# EAGLE board pic_k42 (EAGLE 9.6.2)
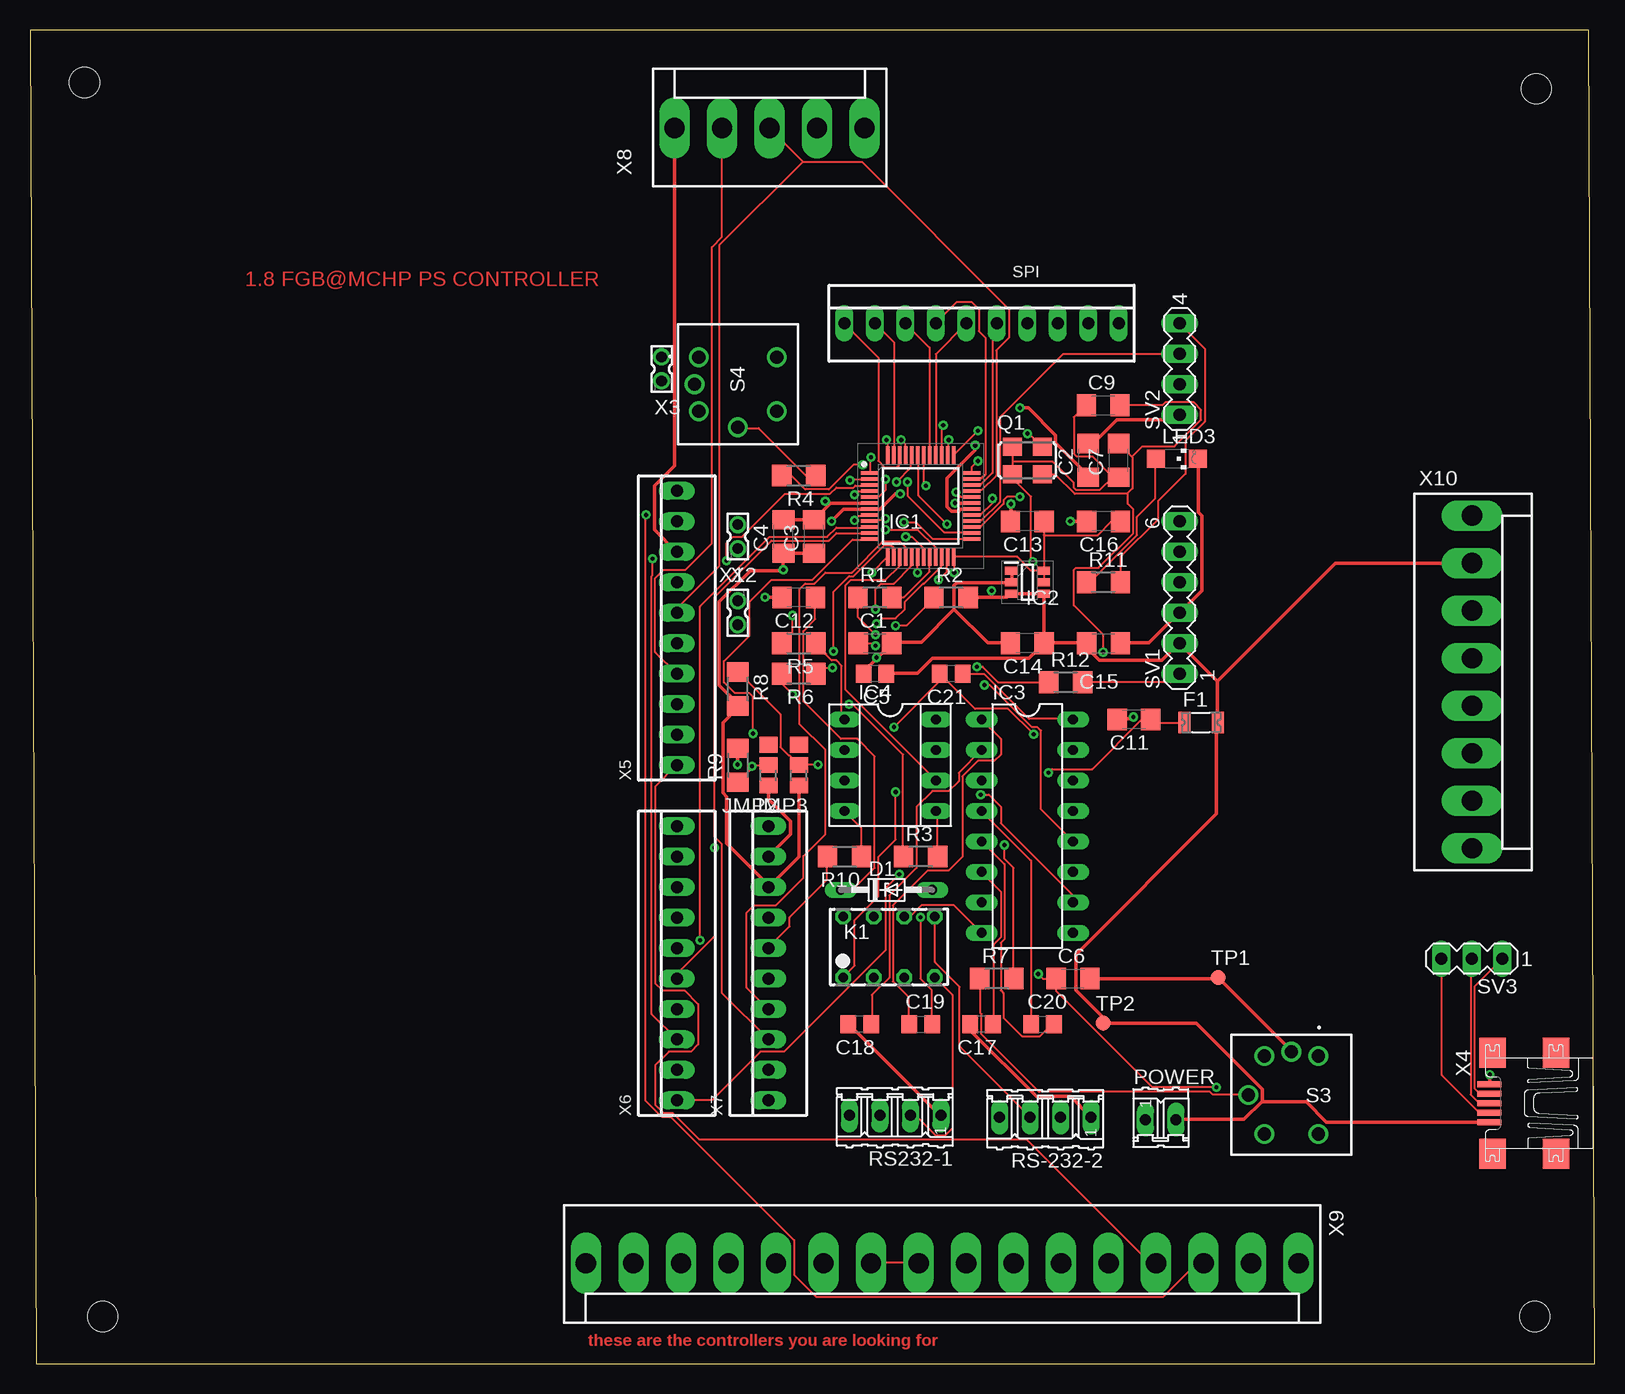
[diagram p0: board, top side]
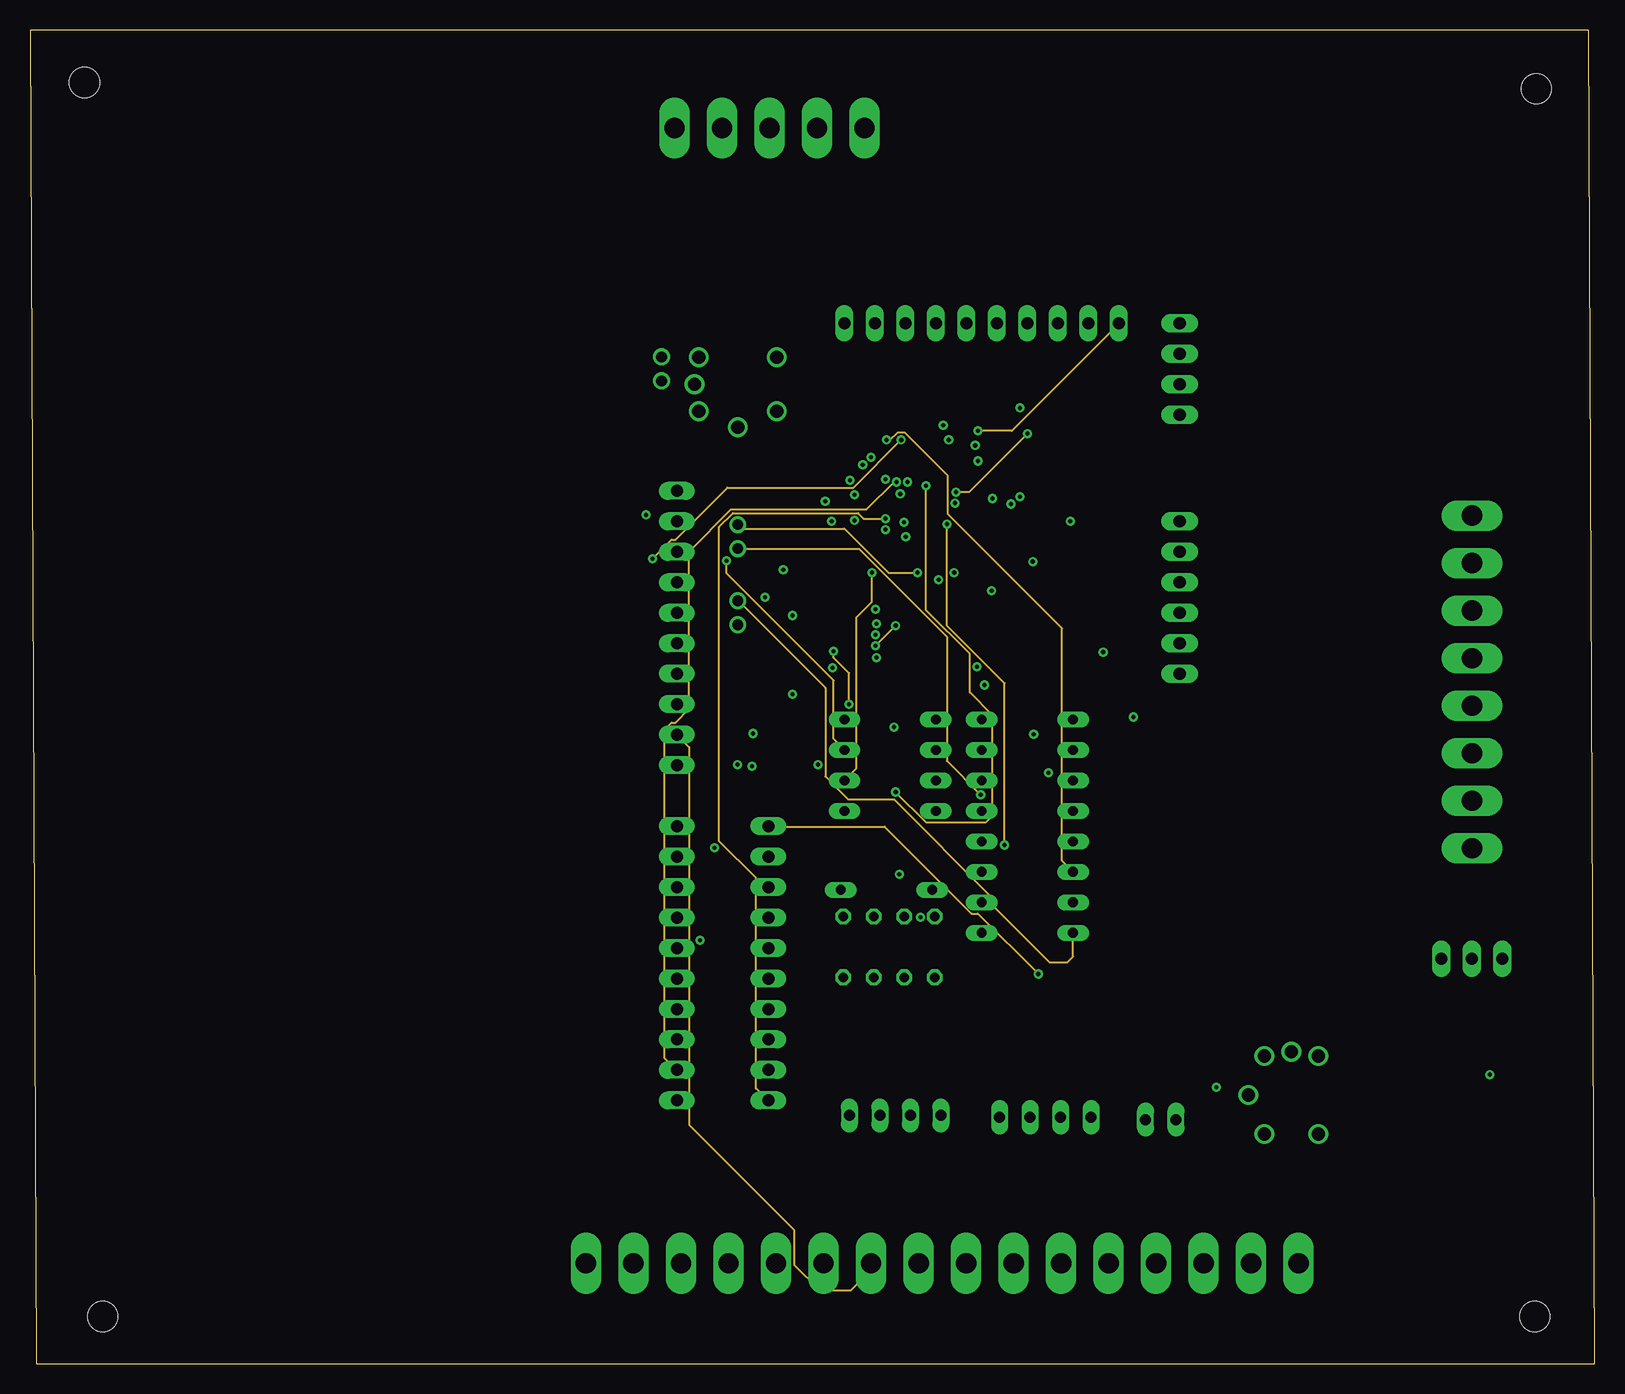
[diagram p1: board, inner layer Route2]
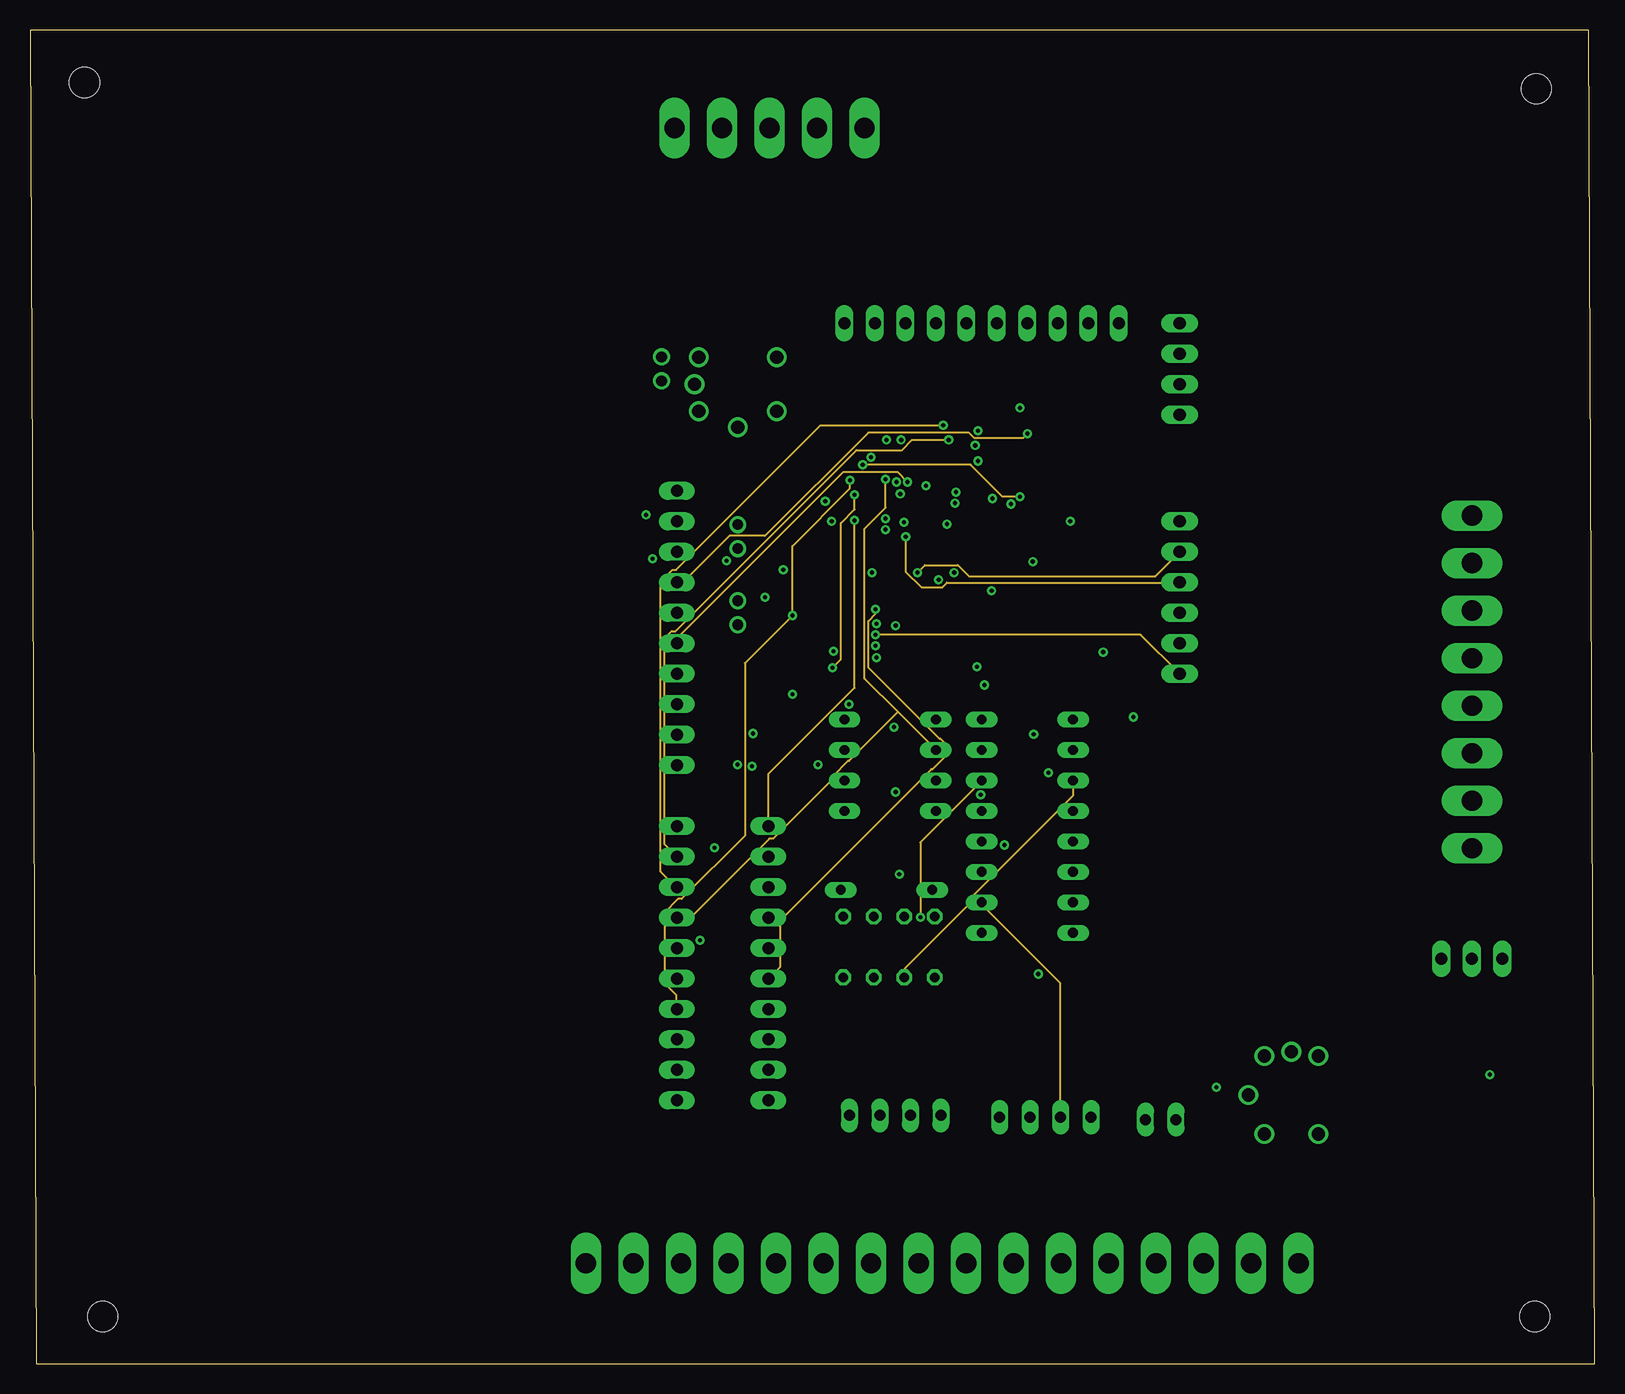
[diagram p2: board, inner layer Route15]
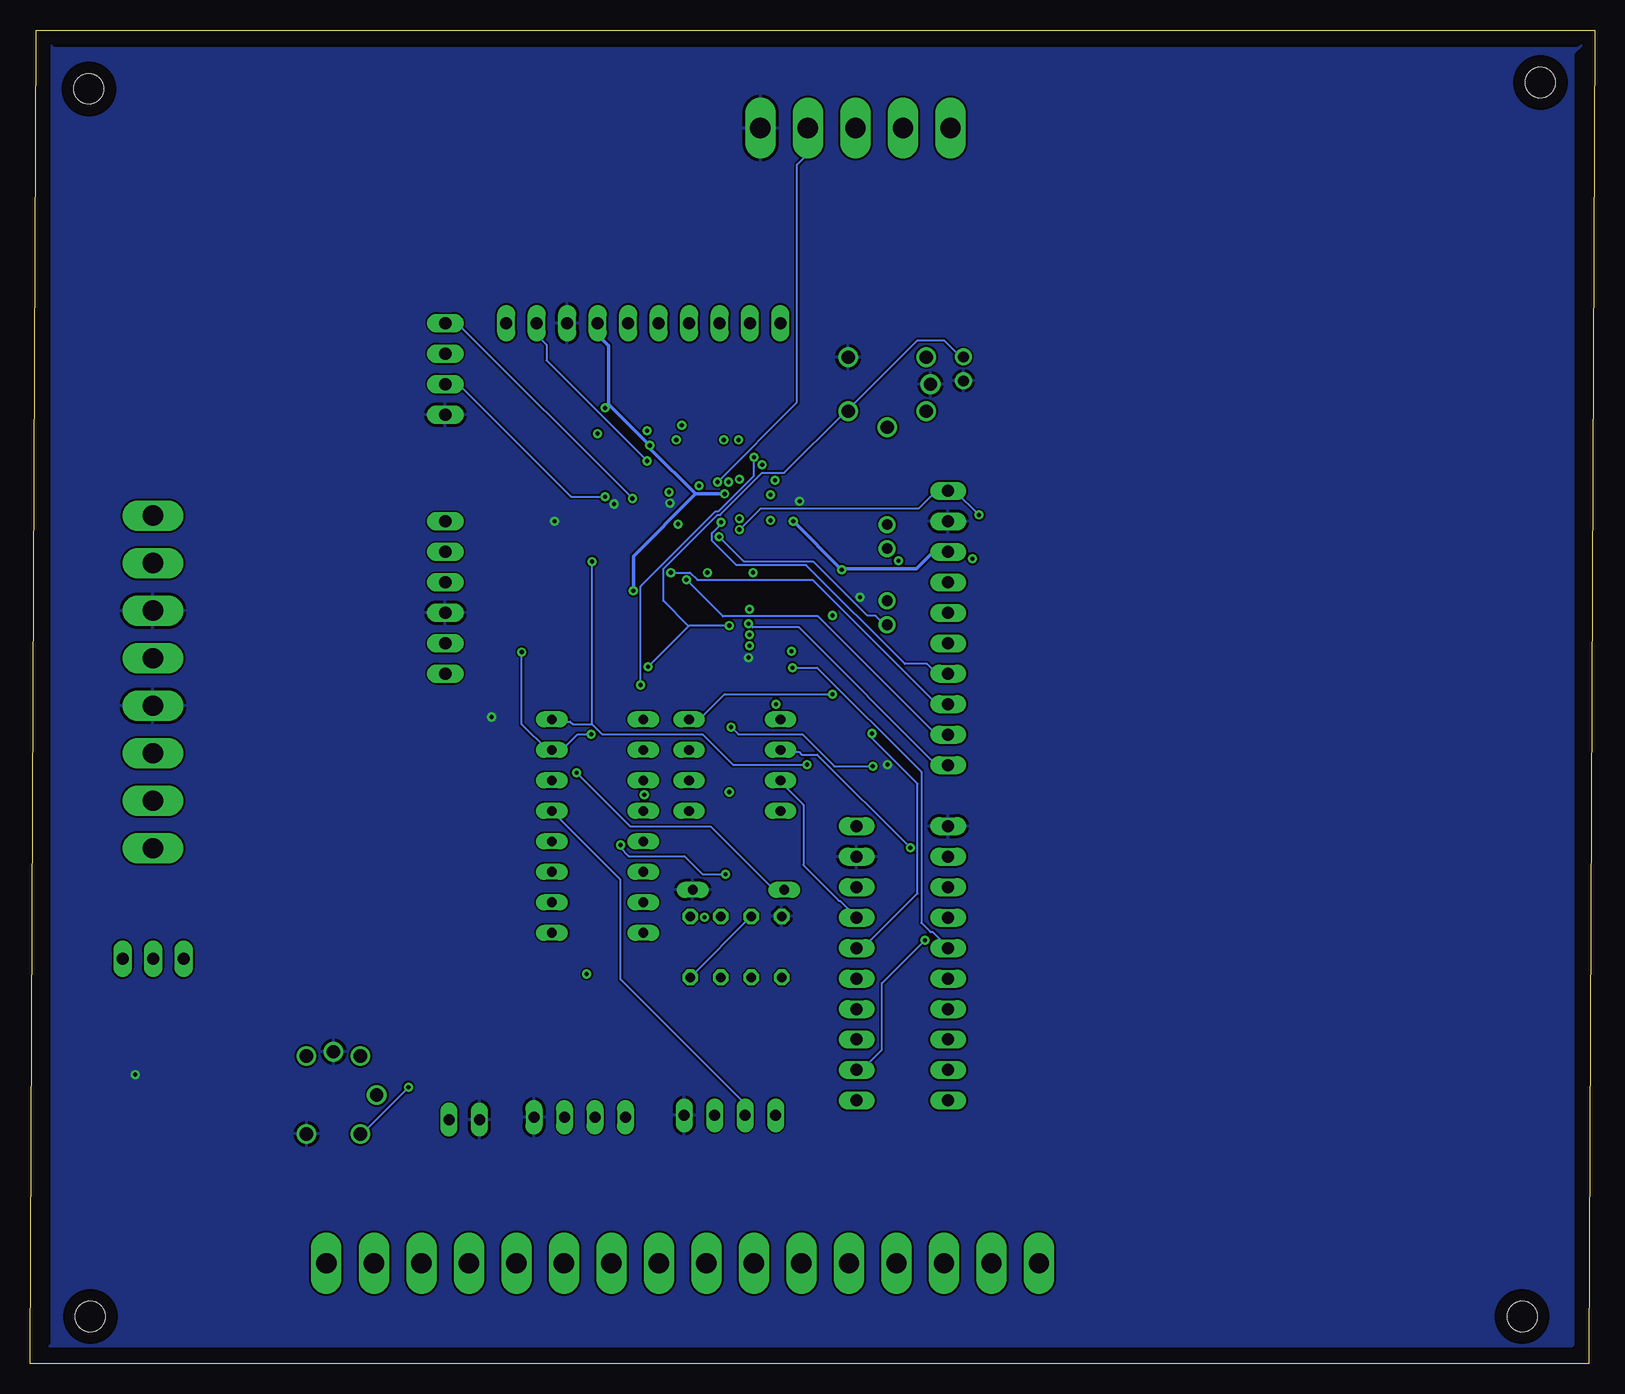
[diagram p3: board, bottom side, seen from below]

Size 130.45 x 111.12 mm. Coordinates in mm from the lower left corner, seen from the top.
Outline: 0.53,0 130.45,0 129.92,111.13 0,111.13 0.53,0
Copper layers (1+2*15+16): Top 0.035mm / dielectric 1.5mm / Route2 0.035mm / dielectric 0.15mm / Route15 0.035mm / dielectric 0.2mm / Bottom 0.035mm
Design rules "default *": minimum track width 6mil, minimum drill 0.35mm, track to track 6mil, track to pad 6mil, pad to pad 6mil, via to via 6mil, smd to smd 6mil, copper to edge 40mil, drill to drill 6mil, minimum pad ring 10mil, minimum via ring 8mil, stop-mask expansion 4mil, vias tented up to drill 0mil, thermal gap 10mil
Net classes: 1 i-line: width 0.3 mm
Holes 2.5 mm at 4.55,106.76 125.55,106.22 6.07,3.91 125.43,3.91

## Footprints (pad centres in the part's own frame; a part is rotated, then mirrored left to right if it is on the bottom)
C1206 = smd 1.6 x 1.8: 1 -1.4,0; 2 1.4,0
C0805 = smd 1.3 x 1.5: 1 -0.95,0; 2 0.95,0
DO34Z7 = drill 0.813 long: A 3.81,0; C -3.81,0
1206L = smd 1 x 1.8: 1 -1.4,0; 2 1.4,0
QFP50P900X900X120-48N = smd 1.475 x 0.3: 1 -4.238,2.75; 2 -4.238,2.25; 3 -4.238,1.75; 4 -4.238,1.25; 5 -4.238,0.75; 6 -4.238,0.25; 7 -4.238,-0.25; 8 -4.238,-0.75; 9 -4.238,-1.25; 10 -4.238,-1.75; 11 -4.238,-2.25; 12 -4.238,-2.75; 25 4.238,-2.75; 26 4.238,-2.25; 27 4.238,-1.75; 28 4.238,-1.25; 29 4.238,-0.75; 30 4.238,-0.25; 31 4.238,0.25; 32 4.238,0.75; 33 4.238,1.25; 34 4.238,1.75; 35 4.238,2.25; 36 4.238,2.75 | smd 0.3 x 1.475: 13 -2.75,-4.238; 14 -2.25,-4.238; 15 -1.75,-4.238; 16 -1.25,-4.238; 17 -0.75,-4.238; 18 -0.25,-4.238; 19 0.25,-4.238; 20 0.75,-4.238; 21 1.25,-4.238; 22 1.75,-4.238; 23 2.25,-4.238; 24 2.75,-4.238; 37 2.75,4.238; 38 2.25,4.238; 39 1.75,4.238; 40 1.25,4.238; 41 0.75,4.238; 42 0.25,4.238; 43 -0.25,4.238; 44 -0.75,4.238; 45 -1.25,4.238; 46 -1.75,4.238; 47 -2.25,4.238; 48 -2.75,4.238
SOP95P280X145-6N = smd 1.075 x 0.65: 1 -1.338,0.95; 2 -1.338,0; 3 -1.338,-0.95; 4 1.338,-0.95; 5 1.338,0; 6 1.338,0.95
DIL16 = drill 0.813 long: 1 -8.89,-3.81; 2 -6.35,-3.81; 3 -3.81,-3.81; 4 -1.27,-3.81; 5 1.27,-3.81; 6 3.81,-3.81; 7 6.35,-3.81; 8 8.89,-3.81; 9 8.89,3.81; 10 6.35,3.81; 11 3.81,3.81; 12 1.27,3.81; 13 -1.27,3.81; 14 -3.81,3.81; 15 -6.35,3.81; 16 -8.89,3.81
SOCKET-08 = drill 0.813 long: 1 -3.81,-3.81; 2 -1.27,-3.81; 3 1.27,-3.81; 4 3.81,-3.81; 5 3.81,3.81; 6 1.27,3.81; 7 -1.27,3.81; 8 -3.81,3.81
A0R-JMP = smd 1.5 x 1.3: 1 0,1.7; 2 0,0; 3 0,-1.7
G6K-2P = drill 0.8 octagon: 1 -2.54,-2.54; 2 0,-2.54; 3 2.54,-2.54; 4 5.08,-2.54; 5 5.08,2.54; 6 2.54,2.54; 7 0,2.54; 8 -2.54,2.54
CHIPLED_1206 = smd 1.5 x 1.5: A 0,-1.75; C 0,1.75
02P = drill 0.914 long: 1 -1.27,0; 2 1.27,0
ASF = smd 1.6 x 1.5: 1 -1.25,-1.15; 2 1.25,-1.15; 3 1.25,1.15; 4 -1.25,1.15
R1206 = smd 1.6 x 1.803: 1 -1.422,0; 2 1.422,0
04P = drill 0.914 long: 1 -3.81,0; 2 -1.27,0; 3 1.27,0; 4 3.81,0
B3W-9_1-LED = drill 1.1 pad 1.65: 1 3.25,-2.25; 2 -3.25,-2.25; 3 3.25,2.25; 4 -3.25,2.25; 5 0,3.6; 6 3.6,0
22-23-2101 = drill 1 long: 1 -11.43,0; 2 -8.89,0; 3 -6.35,0; 4 -3.81,0; 5 -1.27,0; 6 1.27,0; 7 3.81,0; 8 6.35,0; 9 8.89,0; 10 11.43,0
MA06-1 = drill 1.016 long: 1 -6.35,0; 2 -3.81,0; 3 -1.27,0; 4 1.27,0; 5 3.81,0; 6 6.35,0
MA04-1 = drill 1.016 long: 1 -3.81,0; 2 -1.27,0; 3 1.27,0; 4 3.81,0
MA03-1 = drill 1.016 long: 1 -2.54,0; 2 0,0; 3 2.54,0
B1,27 = smd 1.27 x 1.27: TP 0,0
332-02 = drill 0.9 pad 1.27: 1 0,-1; 2 0,1
UX60A-MB-5ST = smd 2 x 0.5: 1 2.25,1.6; 2 2.25,0.8; 3 2.25,0; 4 2.25,-0.8; 5 2.25,-1.6 | smd 2.2 x 2.5: M1 -3.3,-4.2; M2 -3.3,4.2; M3 2,4.2; M4 2,-4.2
KK-156-5 = drill 1.7 pad 2.184 long: 1 -7.92,0; 2 -3.96,0; 3 0,0; 4 3.96,0; 5 7.92,0
KK-156-16 = drill 1.7 pad 2.184 long: 1 -29.7,0; 2 -25.74,0; 3 -21.78,0; 4 -17.82,0; 5 -13.86,0; 6 -9.9,0; 7 -5.94,0; 8 -1.98,0; 9 1.98,0; 10 5.94,0; 11 9.9,0; 12 13.86,0; 13 17.82,0; 14 21.78,0; 15 25.74,0; 16 29.7,0
KK-156-8 = drill 1.7 pad 2.184 long: 1 -13.86,0; 2 -9.9,0; 3 -5.94,0; 4 -1.98,0; 5 1.98,0; 6 5.94,0; 7 9.9,0; 8 13.86,0

## Placement (x,y rotation side)
C1  0.1  [C1206]  70.43,60.02 0 top
C2  0.1  [C1206]  88.21,75.26 90 top
C3  0.1  [C1206]  65.35,68.91 90 top
C4  15uf  [C1206]  62.81,68.91 90 top
C5  1uf  [C0805]  70.43,57.48 180 top
C6  0.1  [C1206]  86.94,32.08 0 top
C7  0.1  [C1206]  90.75,75.26 90 top
C9  0.1  [C1206]  89.46,79.86 0 top
C11  15uf  [C1206]  92.02,53.67 180 top
C12  0.1  [C1206]  64.08,63.83 180 top
C13  0.1  [C1206]  83.13,70.18 180 top
C14  0.1  [C1206]  83.13,60.02 180 top
C15  15uf  [C1206]  89.48,60.02 0 top
C16  15uf  [C1206]  89.48,70.18 180 top
C17  1uf  [C0805]  79.32,28.27 180 top
C18  1uf  [C0805]  69.16,28.27 180 top
C19  1uf  [C0805]  74.24,28.27 0 top
C20  1uf  [C0805]  84.4,28.27 0 top
C21  1uf  [C0805]  76.78,57.48 180 top
D1  5.6v  [DO34Z7]  71.4,39.47 0 top
F1  1206L050  [1206L]  97.61,53.42 0 top
IC1  PIC18F57K42-E_PT  [QFP50P900X900X120-48N]  74.24,71.45 0 top
IC2  REF3440IDBVR  [SOP95P280X145-6N]  83.13,65.1 0 top
IC3  MAX232  [DIL16]  83.13,44.78 270 top
IC4  ILAMP  [SOCKET-08]  71.7,49.86 270 top
JMP2  0R-JUMPA  [A0R-JMP]  61.54,49.86 180 top
JMP3  0R-JUMPA  [A0R-JMP]  64.08,49.86 180 top
K1  G6K-2P  [G6K-2P]  70.33,34.72 0 top
LED3  DBLED  [CHIPLED_1206]  95.61,75.39 270 top
POWER  5VDC  [02P]  94.26,20.32 0 top
Q1  ASF1  [ASF]  83.13,75.26 0 top
R1  220  [R1206]  70.43,63.83 0 top
R2  10000  [R1206]  76.78,63.83 0 top
R3  220  [R1206]  74.24,42.24 0 top
R4  220  [R1206]  64.08,73.99 180 top
R5  220  [R1206]  64.08,60.02 180 top
R6  220  [R1206]  64.08,57.48 180 top
R7  220  [R1206]  80.59,32.08 0 top
R8  0  [R1206]  59,56.21 270 top
R9  0  [R1206]  59,49.86 90 top
R10  220  [R1206]  67.89,42.24 180 top
R11  220  [R1206]  89.48,65.1 0 top
R12  220  [R1206]  86.33,56.77 0 top
RS232-1  serial1  [04P]  72.11,20.68 180 top
RS-232-2  serial2  [04P]  84.63,20.52 180 top
S3  MODE SW  [B3W-9_1-LED]  105.16,22.38 90 top
S4  RESET SW  [B3W-9_1-LED]  59,81.61 180 top
SPI  LCD  [22-23-2101]  79.32,86.69 0 top
SV1  ICSP  [MA06-1]  95.83,63.83 90 top
SV2  DEBUG  [MA04-1]  95.83,82.88 90 top
SV3  USBH  [MA03-1]  120.19,33.73 180 top
TP1  TPB1,27  [B1,27]  99.06,32.18 0 top
TP2  TPB1,27  [B1,27]  89.46,28.37 0 top
X1  RX-2  [332-02]  59,62.56 180 top
X2  TX-2  [332-02]  59,68.91 0 top
X3  RESETJMP  [332-02]  52.65,82.88 0 top
X4  MINI-USB-UX60A-MB-5ST  [UX60A-MB-5ST]  123.9,21.69 180 top
X5  PORTA  [22-23-2101]  53.92,61.29 90 top
X6  PORTD  [22-23-2101]  53.92,33.35 90 top
X7  PORTB  [22-23-2101]  61.54,33.35 90 top
X8  J3  [KK-156-5]  61.65,102.95 0 top
X9  J2  [KK-156-16]  76.05,8.36 180 top
X10  J1  [KK-156-8]  120.22,56.79 270 top

## Library data of the parts
C1-C7 C9 C11-C21 = rcl; SPICEPREFIX: C
D1 = diode
F1 = polyfuse-smd_10; MF: Littelfuse; MPN: 1206L050; OC_FARNELL: 1596993; OC_NEWARK: 53M6118
IC1 = SamacSys_Parts; DESCRIPTION: 8-bit Microcontrollers - MCU 128KB Flash, 8KB RAM, 256B EEPROM, 12-bit ADC2, Vector Interrupts, DMA, MAP, DIA, DAC, Comp, PWM, CWG, HLT, WWDT, SCAN/CRC, ZCD, PPS, EUSART, SPI/I2C, IDLE/DOZE/PMD; HEIGHT: 1.2mm; MANUFACTURER_NAME: Microchip; MANUFACTURER_PART_NUMBER: PIC18F57K42-E/PT; MOUSER_PART_NUMBER: 579-PIC18F57K42-E/PT
IC2 = SamacSys_Parts; DESCRIPTION: 4.1V Low-Drift Low-Power Small-Footprint Series Voltage Reference; HEIGHT: 1.45mm; MANUFACTURER_NAME: Texas Instruments; MANUFACTURER_PART_NUMBER: REF3440IDBVR
IC3 = maxim; MF: MAXIM; MPN: MAX232ACPE+; OC_FARNELL: 9723773; OC_NEWARK: 68K4544
IC4 = ic-package
JMP2 JMP3 = jump-0r-smd
K1 = relay; MF: OMRON COMPONENTS USA; MPN: G6K-2P DC3; OC_FARNELL: 3937276; OC_NEWARK: 89C6482
LED3 = led
POWER RS232-1 RS-232-2 = con-amp-quick; OC_FARNELL: unknown; OC_NEWARK: unknown
Q1 = crystal; OC_FARNELL: unknown; OC_NEWARK: unknown
R1-R12 = rcl; SPICEPREFIX: R
S3 S4 = SamacSys_Parts; ALLIED_NUMBER: 70176005; ALLIED_PRICE-STOCK: https://www.alliedelec.com/omron-electronic-components-b3w-9000-y1n/70176005/; DESCRIPTION: Illuminated Tactile Switches Illuminated Ylw LED White Cap; HEIGHT: mm; MANUFACTURER_NAME: Omron Electronics; MANUFACTURER_PART_NUMBER: B3W-9000-Y1N; MOUSER_PART_NUMBER: 653-B3W-9000-Y1N; MOUSER_PRICE-STOCK: https://www.mouser.com/Search/Refine.aspx?Keyword=653-B3W-9000-Y1N; RS_PART_NUMBER: 0492777P; RS_PRICE-STOCK: http://uk.rs-online.com/web/p/products/0492777P
SPI X5-X7 = con-molex; MF: MOLEX; MPN: 22-23-2101; OC_FARNELL: 1756828; OC_NEWARK: 94C0765
SV1-SV3 = con-lstb; OC_FARNELL: unknown; OC_NEWARK: unknown
TP1 TP2 = testpad
X1-X3 = con-garry
X4 = con-hirose; OC_FARNELL: unknown; OC_NEWARK: unknown
X8-X10 = con-molex; MF: MOLEX; OC_FARNELL: unknown; OC_NEWARK: unknown

## Nets
GND: C7.2 C9.2 C21.2 IC3.15 JMP2.2 Q1.2 R9.1
N$1: R1.1 R12.2 SV1.1
N$2: IC1.20 R1.2
N$3: IC4.1 R5.1
N$4: IC1.32 Q1.3 X5.7
N$5: C17.1 IC3.6
N$6: IC1.19 SV1.4 X1.2
N$7: IC1.18 SV1.5 X2.2
N$8: C13.1 C16.1 IC1.24 IC2.5 IC2.6 X5.3
N$9: C18.1 IC3.2
N$10: C19.1 IC3.1
N$11: C20.1 IC3.4
N$12: C20.2 IC3.5
N$13: C19.2 IC3.3
N$14: K1.4 K1.7 RS232-1.2
N$15: IC3.7 RS-232-2.2
N$16: IC3.13 RS232-1.3
N$17: IC4.8 R6.2
N$18: IC1.1 IC3.12
N$19: IC3.9 X1.1
N$20: IC1.48 IC3.11
N$21: R4.1 S4.5
N$22: IC3.10 X2.1
N$23: IC1.27 R4.2 SV2.2
N$24: IC1.28 SV2.3
N$25: IC1.29 R11.2 SV2.4
N$26: IC3.14 K1.3
N$27: IC3.8 K1.6
N$28: IC1.42 K1.1
N$29: IC1.46 SPI.1
N$30: IC1.47 SPI.2
N$31: IC1.41 SPI.3
N$32: IC1.35 SPI.4
N$33: IC1.40 SPI.5
N$34: IC1.34 SPI.6
N$35: IC1.26 X5.5 X8.4
N$36: IC1.25 X5.4 X8.2
N$37: IC1.23 X5.2 X9.9 X9.10
N$38: IC1.22 X5.1 X9.4
N$39: IC1.21 X5.10 X9.3
N$40: IC1.33 X5.6 X8.3
N$41: IC1.36 SPI.9
N$42: IC1.37 SPI.10
N$43: C6.1 IC1.8 S3.4 X7.10
N$44: IC1.44 X6.2
N$45: IC1.45 X6.3
N$46: IC1.2 R5.2 X6.4
N$47: IC1.3 IC4.2 X6.5
N$48: IC1.4 R6.1 X6.6
N$49: IC1.5 IC4.7 X6.7
N$50: IC1.38 X6.9
N$51: IC1.39 X6.8
N$52: IC1.43 R7.2 X6.1
N$53: IC1.9 X7.1
N$54: IC1.10 X7.2
N$55: IC4.5 R3.2
N$56: IC1.16 X7.4
N$57: IC1.17 X7.5
N$58: IC1.12 R10.2 X7.6
N$59: IC1.13 IC4.3 X7.7
N$60: IC1.15 IC4.6
N$61: IC1.14 R3.1
N$62: K1.5 RS-232-2.3
N$63: IC4.4 R10.1
N$64: R7.1 S3.5
N$65: LED3.A R11.1
N$66: IC1.11 X7.3
N$67: SV3.1 X4.4
N$68: SV3.2 X4.3
N$69: SV3.3 X4.2
N$70: C1.1 R2.1 R12.1 S4.4 X3.2
N$71: C11.1 C12.1 D1.C F1.1
VCC: C7.1 C9.1 C21.1 IC3.16 JMP3.2 Q1.1 Q1.4 R8.1
VDD [i-line]: C2.1 C3.1 C4.1 C5.1 C14.1 C15.1 F1.2 IC1.7 IC1.30 IC2.3 IC2.4 JMP3.1 POWER.2 R2.2 R8.2 SPI.7 SV1.2 TP2.TP X4.1 X5.8 X7.8 X8.1 X10.2
VSS [i-line]: C1.2 C2.2 C3.2 C4.2 C5.2 C6.2 C11.2 C12.2 C13.2 C14.2 C15.2 C16.2 C17.2 C18.2 D1.A IC1.6 IC1.31 IC2.1 IC2.2 JMP2.1 K1.8 LED3.C POWER.1 R9.2 RS232-1.1 RS-232-2.1 S3.2 S3.6 S4.2 S4.6 SPI.8 SV1.3 SV2.1 TP1.TP X3.1 X4.5 X5.9 X6.10 X7.9 X8.5 X10.3 X10.5

## Tracks (layer width: path | path; a pad name or v marks a point on that pad's centre or on a via)
GND  (via drill 0.35)
  Top 0.152: 91.48,72.5 91.9,72.92 91.9,75.51 91.86,75.55 | 91.48,72.5 91.44,72.47 87.1,72.47 85.5,74.07 84.43,74.07 Q1.2 | 91.86,75.55 C7.2 | C9.2 94.41,79.86 94.64,80.09 97,80.09 97.61,79.48 97.61,78.64 95.4,76.43 92.74,76.43 91.86,75.55 | 60.24,49.64 59.06,48.46 R9.1 | 60.24,49.64 60.43,49.84 61.49,49.84 JMP2.2 | v83.67,52.43 81.53,54.56 78.79,54.56 75.9,57.46 C21.2 76.12,57.15 v72.01,53.04 | v60.2,49.76 60.2,49.68 60.24,49.64 | v89.46,59.28 89.46,60.73 87.02,63.17 87.02,66.14 87.17,66.29 89.08,66.29 91.97,69.19 91.97,71.17 91.52,71.63 91.52,72.47 91.48,72.5
  Bottom 0.152: v83.67,52.43 84.81,52.43 86.11,51.13 IC3.15 87.33,51.13 89.46,53.26 v89.46,59.28 | v60.2,49.76 63.4,49.76 66.07,52.43 71.4,52.43 v72.01,53.04
N$1  (via drill 0.35)
  Top 0.152: R12.2 95.1,56.77 95.78,57.46 SV1.1 | v70.49,60.73 69.04,62.18 69.04,63.78 R1.1
  Route15 0.152: v70.49,60.73 92.58,60.73 SV1.1
N$2
  Top 0.152: IC1.20 74.98,67.21 74.98,65.99 72.85,63.86 71.86,63.86 R1.2
N$3
  Top 0.152: R5.1 65.53,59.97 66.37,59.13 66.37,59.06 66.83,58.6 67.21,58.6 67.67,58.14 67.67,53.95 67.89,53.72 IC4.1
N$4  (via drill 0.35)
  Top 0.152: v77.19,72.62 77.57,72.24 78.41,72.24 IC1.32 | v83.13,77.5 83.29,77.5 84.35,76.43 Q1.3
  Route2 0.152: v77.19,72.62 78.26,72.62 v83.13,77.5
  Route15 0.152: v83.13,77.5 82.75,77.11 78.71,77.11 78.26,77.57 69.88,77.57 61.27,68.96 58.29,68.96 54.48,65.15 53.95,65.15 X5.7
N$5
  Top 0.152: C17.1 80.32,28.27 80.32,34.9 80.92,35.51 80.92,39.32 79.32,40.92 IC3.6
N$6  (via drill 0.35)
  Top 0.152: v73,68.89 73.53,68.89 74.45,67.97 74.45,67.28 IC1.19
  Route15 0.152: v73,68.89 73,65.99 74.3,64.69 76.05,64.69 76.43,65.08 95.78,65.08 SV1.4
  Bottom 0.152: v73,68.89 70.94,66.83 65.15,66.83 60.66,62.33 59.97,62.33 59.51,61.87 59.36,61.87 59.06,61.57 X1.2
N$7  (via drill 0.35)
  Top 0.152: v73.99,65.91 IC1.18
  Route2 0.152: v73.99,65.91 71.55,65.91 67.89,69.57 59.36,69.57 59.06,69.88 X2.2
  Route15 0.152: SV1.5 93.8,65.61 78.26,65.61 77.34,66.52 74.6,66.52 v73.99,65.91
N$8  (via drill 0.35)
  Top 0.152: IC2.5 84.51,65.15 84.51,65.99 IC2.6 | 84.51,69.04 84.51,70.18 C13.1 | 84.51,69.04 84.51,66.07 IC2.6 | IC2.6 84.43,66.07 83.44,66.07 82.3,67.21 77.04,67.21 IC1.24 77.04,67.13 v77.04,65.91 | C16.1 90.14,70.18 89,69.04 84.51,69.04
  Bottom 0.152: X5.3 54.86,54.94 65.23,65.3 74.83,65.3 75.44,65.91 v77.04,65.91
N$9
  Top 0.152: IC3.2 77.42,49.23 77.42,48.54 76.58,47.7 75.21,47.7 73.91,46.41 73.91,41.3 71.63,39.01 71.63,32.16 70.18,30.71 70.18,28.27 C18.1
N$10
  Top 0.152: C19.1 73.23,28.27 73.23,30.56 71.93,31.85 71.93,38.18 74.83,41.07 76.58,41.07 77.72,42.22 77.72,48.92 79.02,50.22 80.39,50.22 80.92,50.75 80.92,52.04 79.32,53.65 IC3.1
N$11
  Top 0.152: C20.1 83.44,28.27 83.44,41.91 79.32,46.03 IC3.4
N$12
  Top 0.152: C20.2 85.19,28.27 84.2,27.28 82.68,27.28 81.15,28.8 81.15,30.86 80.92,31.09 80.92,35.05 81.23,35.36 81.23,41.61 IC3.5
N$13  (via drill 0.35)
  Top 0.152: v74.22,37.19 74.22,32.08 75.13,31.17 75.13,28.27 C19.2
  Route15 0.152: v74.22,37.19 74.22,43.43 79.32,48.54 IC3.3
N$14
  Top 0.152: K1.4 76.89,30.71 76.89,19.58 76.28,18.97 75.51,18.97 73.84,20.65 73.38,20.65 RS232-1.2
  Bottom 0.152: K1.7 K1.4
N$15
  Route15 0.152: IC3.7 79.32,38.25 85.88,31.7 85.88,20.57 RS-232-2.2
N$16
  Bottom 0.152: IC3.13 86.94,46.03 81.23,40.31 81.23,32 70.87,21.64 70.87,20.73 RS232-1.3
N$17  (via drill 0.35)
  Top 0.152: v63.55,55.78 62.71,56.62 62.71,57.46 R6.2
  Bottom 0.152: v63.55,55.78 72.54,55.78 74.6,53.72 75.51,53.72 IC4.8
N$18  (via drill 0.35)
  Top 0.152: v70.1,75.51 70.03,75.44 70.03,74.22 IC1.1 | v79.55,56.54 80.01,56.54 83.52,53.04 83.97,53.04 84.28,52.73 84.28,46.18 IC3.12
  Bottom 0.152: v70.1,75.51 70.1,73.99 73.08,71.02 73.3,71.02 79.55,64.77 v79.55,56.54
N$19
  Route2 0.152: IC3.9 86.94,33.91 86.49,33.45 84.96,33.45 80.24,38.18 80.24,38.79 72.01,47.02 68.2,47.02 66.29,48.92 66.29,56.31 59.06,63.55 X1.1
N$20  (via drill 0.35)
  Top 0.152: v71.4,76.96 71.48,76.89 71.48,75.74 IC1.48
  Route2 0.152: v71.4,76.96 71.7,76.96 72.31,77.57 72.92,77.57 76.51,73.99 76.51,70.79 86.03,61.27 86.03,41.91 86.94,41 IC3.11
N$21
  Top 0.152: R4.1 64.69,73.99 60.73,77.95 59.06,77.95 S4.5
N$22  (via drill 0.35)
  Top 0.152: IC3.10 86.94,39.01 80.92,45.03 80.92,46.41 79.93,47.4 v79.25,47.4
  Route2 0.152: v79.25,47.4 76.43,50.22 76.43,60.58 69.11,67.89 59.06,67.89 X2.1
N$23  (via drill 0.35)
  Top 0.152: v82.52,72.24 81.46,72.24 81.15,71.93 81.15,71.63 79.25,69.72 78.49,69.72 IC1.27 | R4.2 63.47,73.99 64.62,72.85 66.6,72.85 68.66,74.9 v69.42,74.9
  Route15 0.152: v69.42,74.9 78.41,74.9 81.08,72.24 v82.52,72.24
  Bottom 0.152: v82.52,72.24 85.34,72.24 94.72,81.61 SV2.2
N$24
  Top 0.152: IC1.28 78.49,70.26 79.32,70.26 80.85,71.78 80.85,78.87 86.11,84.13 95.78,84.13 SV2.3
N$25  (via drill 0.35)
  Top 0.152: v80.24,72.09 80.24,71.7 79.25,70.71 78.49,70.71 IC1.29 | R11.2 90.91,65.15 90.91,67.21 94.03,70.33 94.03,71.86 96.32,74.14 96.32,76.89 97.92,78.49 97.92,84.58 95.86,86.64 SV2.4
  Bottom 0.152: v80.24,72.09 94.79,86.64 95.78,86.64 SV2.4
N$26
  Route15 0.152: IC3.14 86.94,47.32 78.41,38.79 78.41,38.41 72.92,32.92 72.92,32.23 K1.3
N$27
  Top 0.152: K1.6 73.38,37.26 74.3,38.18 77.04,38.18 IC3.8
N$28  (via drill 0.35)
  Top 0.152: v74.68,73.15 74.52,73.3 74.52,75.67 IC1.42 | v72.16,47.63 72.16,43.66 70.71,42.22 70.71,38.94 68.73,36.96 68.73,33.15 67.82,32.23 K1.1
  Route2 0.152: v74.68,73.15 74.68,62.79 78.33,59.13 78.33,55.93 80.24,54.03 80.24,45.64 79.71,45.11 74.68,45.11 v72.16,47.63
N$29
  Top 0.152: IC1.46 72.47,75.67 72.47,74.9 72.24,74.68 71.25,74.68 70.71,75.21 70.71,83.82 67.89,86.64 SPI.1
N$30
  Top 0.152: SPI.2 72.01,85.12 72.01,75.74 IC1.47
N$31
  Top 0.152: IC1.41 74.98,75.74 74.98,84.66 73,86.64 SPI.3
N$32
  Top 0.152: IC1.35 78.49,73.76 79.32,73.76 79.63,74.07 79.63,85.5 79.1,86.03 79.1,87.86 78.49,88.47 77.27,88.47 75.51,86.72 SPI.4
N$33
  Top 0.152: IC1.40 75.51,75.74 75.51,84.13 78.03,86.64 SPI.5
N$34
  Top 0.152: SPI.6 80.24,86.33 80.24,74.22 79.25,73.23 78.49,73.23 IC1.34
N$35  (via drill 0.35)
  Top 0.152: v73.15,73.46 73.15,72.31 76.2,69.27 78.41,69.27 IC1.26
  Route15 0.152: v73.15,73.46 72.31,74.3 67.82,74.3 53.95,60.43 53.95,60.05 X5.5
  Bottom 0.152: v73.15,73.46 66.52,80.09 66.52,99.9 65.61,100.81 X8.4
N$36  (via drill 0.35)
  Top 0.152: v72.85,70.1 73.84,70.1 75.21,68.73 78.41,68.73 IC1.25 | X5.4 52.12,59.28 52.12,65.46 52.81,66.14 54.64,66.14 56.85,68.35 56.85,93.04 57.68,93.88 X8.2
  Bottom 0.152: v72.85,70.1 72.85,69.95 73.61,69.19 73.61,68.58 71.55,66.52 65.76,66.52 57.53,58.29 55.7,58.29 54.94,57.53 53.95,57.53 X5.4
N$37  (via drill 0.35)
  Top 0.152: X9.10 70.18,8.38 74.07,8.38 X9.9 | v75.74,65.3 76.43,65.99 76.43,67.21 IC1.23
  Route2 0.152: X9.10 70.1,8.31 70.1,7.77 68.43,6.1 65.84,6.1 63.7,8.23 63.7,11.13 54.94,19.89 54.94,51.36 53.95,52.35 X5.2
  Bottom 0.152: v75.74,65.3 72.7,62.26 64.77,62.26 55.25,52.73 54.25,52.73 X5.2
N$38  (via drill 0.35)
  Top 0.152: v70.56,61.65 71.02,62.1 72.16,62.1 72.92,62.87 72.92,63.47 74.45,65 74.52,65 75.97,66.45 75.97,67.21 IC1.22 | X9.4 93.8,8.38 93.35,8.38 83.06,18.67 55.78,18.67 53.57,20.88 52.81,20.88 52.12,21.56 52.12,24.84 53.26,25.98 55.09,25.98 55.7,26.59 55.7,29.95 54.56,31.09 52.73,31.09 52.12,31.7 52.12,48.08 53.87,49.84 X5.1
  Bottom 0.152: v70.56,61.65 70.26,61.34 66.37,61.34 54.94,49.91 53.95,49.91 X5.1
N$39  (via drill 0.35)
  Top 0.152: v71.32,69.49 73.99,69.49 75.44,68.05 75.44,67.28 IC1.21 | v51.36,70.71 51.28,70.64 51.28,21.95 52.65,20.57 53.42,20.57 63.7,10.29 63.7,7.39 65.53,5.56 94.49,5.56 97.23,8.31 97.76,8.31 X9.3
  Bottom 0.152: v71.32,69.49 69.57,71.25 56.39,71.25 55.25,72.39 54.25,72.39 X5.10 53.87,72.7 53.34,72.7 v51.36,70.71
N$40
  Top 0.152: X8.3 64.43,100.17 | 64.43,100.17 64.47,100.13 69.34,100.13 81.61,87.86 81.61,85.5 80.54,84.43 80.54,73.99 79.32,72.77 78.49,72.77 IC1.33 | 64.43,100.17 57.46,93.19 57.46,66.45 53.95,62.94 53.95,62.56 X5.6
N$41  (via drill 0.35)
  Top 0.152: v79.02,75.21 78.49,74.68 78.49,74.22 IC1.36
  Bottom 0.152: v79.02,75.21 87.4,83.59 87.4,84.89 88.16,85.65 88.16,86.64 SPI.9
N$42  (via drill 0.35)
  Top 0.152: v79.02,77.72 77.04,75.74 IC1.37
  Route2 0.152: v79.02,77.72 81.84,77.72 90.75,86.64 SPI.10
N$43  (via drill 0.35)
  Top 0.152: v98.91,23.01 93.57,23.01 85.57,31.01 85.57,32.08 C6.1 84.43,32.08 v84.05,32.46 | v68.73,70.26 69.11,70.64 69.95,70.64 IC1.8
  Route2 0.152: v84.05,32.46 79.02,37.49 78.49,37.49 71.25,44.73 61.57,44.73 X7.10
  Route15 0.152: v68.73,70.26 68.73,56.31 61.57,49.15 61.57,44.81 X7.10
  Bottom 0.152: v98.91,23.01 102.72,19.2 102.87,19.2 S3.4
N$44  (via drill 0.35)
  Top 0.152: v72.24,73.46 73.46,74.68 73.46,75.67 IC1.44
  Route2 0.152: v72.24,73.46 72.01,73.46 69.72,71.17 58.45,71.17 54.94,67.67 54.94,54.56 53.8,53.42 53.49,53.42 52.88,52.81 52.88,25.45 53.87,24.46 X6.2
N$45  (via drill 0.35)
  Top 0.152: v72.62,76.96 72.92,76.66 72.92,75.74 IC1.45 | v51.89,67.06 51.89,65.68 51.82,65.61 51.82,29.11 X6.3
  Route2 0.152: v72.62,76.96 68.66,73 58.14,73 53.8,68.66 53.49,68.66 v51.89,67.06
N$46  (via drill 0.35)
  Top 0.152: v68.35,73.61 68.43,73.69 69.95,73.69 IC1.2 | v63.55,62.33 63.55,60.88 62.71,60.05 R5.2
  Route15 0.152: v68.35,73.61 68.35,72.92 63.55,68.12 v63.55,62.33 59.59,58.37 59.59,43.97 54.33,38.71 54.03,38.71 52.88,37.57 52.88,31.7 53.87,30.71 53.87,29.57 X6.4
N$47  (via drill 0.35)
  Top 0.152: v58.06,66.9 58.06,68.35 58.6,68.89 59.36,68.89 62.94,72.47 66.68,72.47 67.21,73 68.66,73 68.81,73.15 69.95,73.15 IC1.3 | v57.07,42.98 57.07,35.59 53.95,32.46 53.95,32.08 X6.5
  Route2 0.152: v58.06,66.9 58.06,65.84 66.98,56.92 66.98,52.04 IC4.2
  Bottom 0.152: v57.07,42.98 64.85,50.75 66.14,50.75 66.37,50.98 67.74,50.98 IC4.2
N$48  (via drill 0.35)
  Top 0.152: v68.73,72.39 69.04,72.7 69.95,72.7 IC1.4 | v66.9,57.99 65.99,57.99 65.53,57.53 R6.1
  Route15 0.152: v68.73,72.39 68.73,71.17 67.59,70.03 67.59,58.67 v66.9,57.99
  Bottom 0.152: v66.9,57.99 64.85,57.99 56.16,49.3 56.16,36.73 55.4,35.97 55.25,35.97 53.95,34.67 X6.6
N$49  (via drill 0.35)
  Top 0.152: v71.32,73.69 71.32,72.77 70.79,72.24 70.03,72.24 IC1.5
  Route15 0.152: v71.32,73.69 71.32,71.32 69.57,69.57 69.57,57.07 72.35,54.29 | IC4.7 72.35,54.29 | 72.35,54.29 68.28,50.22 68.2,50.22 66.98,49 66.98,48.77 61.95,43.74 61.65,43.74 55.09,37.19 53.95,37.19 X6.7
N$50  (via drill 0.35)
  Top 0.152: v76.58,76.96 76.51,76.89 76.51,75.74 IC1.38
  Route15 0.152: v76.58,76.96 73.53,76.96 72.7,76.12 68.89,76.12 53.8,61.04 53.49,61.04 52.88,60.43 52.88,43.28 X6.9
N$51  (via drill 0.35)
  Top 0.152: v76.12,78.18 75.97,78.03 75.97,75.74 IC1.39
  Route15 0.152: v76.12,78.18 65.91,78.18 53.87,66.14 53.57,66.14 52.58,65.15 52.58,41 53.87,39.7 X6.8
N$52  (via drill 0.35)
  Top 0.152: v76.43,69.95 74.07,72.31 74.07,75.67 IC1.43 | v81.23,43.21 81.23,42.06 81.99,41.3 81.99,32.08 R7.2 | v72.47,40.77 71.32,39.62 71.32,34.44 62.87,25.98 60.88,25.98 56.85,21.95 53.95,21.95 X6.1
  Route2 0.152: v76.43,69.95 76.43,61.49 81.23,56.69 v81.23,43.21
  Bottom 0.152: v72.47,40.77 74.37,40.77 75.9,42.29 80.54,42.29 81.23,42.98 v81.23,43.21
N$53  (via drill 0.35)
  Top 0.152: v71.32,70.41 71.17,70.26 70.03,70.26 IC1.9
  Route2 0.152: v71.32,70.41 69.49,70.41 69.04,70.87 58.6,70.87 57.46,69.72 57.46,43.51 60.5,40.46 60.5,22.94 61.49,21.95 X7.1
N$54  (via drill 0.35)
  Top 0.152: v55.85,35.28 55.85,63.09 61.65,68.89 66.45,68.89 67.21,69.65 69.95,69.65 IC1.10
  Bottom 0.152: v55.85,35.28 59.44,31.7 59.44,26.14 61.11,24.46 X7.2
N$55
  Top 0.152: R3.2 75.59,42.29 75.59,45.95 75.51,46.03 IC4.5
N$56
  Top 0.152: IC1.16 72.92,67.28 72.92,68.05 72.47,68.5 71.09,68.5 68.5,65.91 66.29,65.91 65.38,65 64.62,65 64.16,64.54 64.16,53.26 66.29,51.13 66.29,44.12 64.47,42.29 64.47,40.46 62.18,38.18 60.35,38.18 59.74,37.57 59.74,31.32 61.49,29.57 X7.4
N$57  (via drill 0.35)
  Top 0.152: v70.49,62.87 70.49,64.54 70.94,65 72.01,65 73.46,66.45 73.46,67.21 IC1.17
  Route15 0.152: v70.49,62.87 70.49,62.48 69.88,61.87 69.88,57.99 75.82,52.04 75.9,52.04 76.43,51.51 76.43,50.75 75.21,49.53 75.13,49.53 62.56,36.96 62.56,33.07 61.57,32.08 X7.5
N$58  (via drill 0.35)
  Top 0.152: v60.27,52.5 60.27,55.55 59.97,55.85 58.75,55.85 57.84,56.77 57.84,58.52 59.97,60.66 59.97,63.47 61.8,65.3 65.23,65.3 68.58,68.66 69.95,68.66 IC1.12 | R10.2 66.45,42.22 66.45,40.31 63.32,37.19 63.32,36.42 61.57,34.67 X7.6
  Bottom 0.152: v60.27,52.5 60.27,52.12 56.46,48.31 56.46,39.17 60.96,34.67 61.49,34.67 X7.6
N$59  (via drill 0.35)
  Top 0.152: v70.18,65.91 71.48,67.21 IC1.13
  Route2 0.152: v70.18,65.91 70.18,63.47 68.89,62.18 68.89,49.61 67.89,48.62 IC4.3
  Bottom 0.152: X7.7 62.94,38.56 63.02,38.56 65.99,41.53 65.99,46.56 67.89,48.46 IC4.3
N$60
  Top 0.152: IC1.15 72.47,67.21 72.47,66.45 71.32,65.3 68.43,65.3 67.97,64.85 67.97,56.16 75.51,48.62 IC4.6
N$61  (via drill 0.35)
  Top 0.152: v66.98,59.36 66.98,64.31 68.28,65.61 68.66,65.61 71.25,68.2 71.78,68.2 71.93,68.05 71.93,67.28 IC1.14 | v68.28,54.94 68.58,54.94 72.77,50.75 72.77,42.29 R3.1
  Route2 0.152: v66.98,59.36 66.98,58.83 68.28,57.53 v68.28,54.94
N$62
  Top 0.152: K1.5 75.44,37.26 75.44,33.45 77.5,31.39 77.5,26.44 83.36,20.57 RS-232-2.3
N$63
  Top 0.152: R10.1 69.27,42.29 69.27,44.65 67.89,46.03 IC4.4
N$64
  Top 0.152: R7.1 79.25,32.08 79.25,29.18 79.32,29.11 79.32,27.43 84.13,22.63 98.37,22.63 98.6,22.4 101.5,22.4 S3.5
N$65
  Top 0.152: LED3.A 93.8,75.36 93.8,72.09 92.28,70.56 92.28,69.04 88.39,65.15 88.09,65.15 R11.1
N$66
  Top 0.152: X7.3 57.68,30.86 57.68,43.28 57.07,43.89 57.07,63.86 61.8,68.58 66.6,68.58 67.21,69.19 69.95,69.19 IC1.11
N$67
  Top 0.152: SV3.1 120.4,31.39 120.4,22.94 120.78,22.56 121.62,22.56 X4.4
N$68
  Top 0.152: X4.3 121.62,21.72 120.78,21.72 120.09,22.4 120.09,33.6 120.17,33.68 SV3.2
N$69
  Top 0.152: SV3.3 117.65,24.08 120.78,20.96 121.62,20.96 X4.2
N$70  (via drill 0.35)
  Top 0.152: v70.49,59.82 70.33,59.97 69.04,59.97 C1.1 | v72.16,61.49 73.08,61.49 75.36,63.78 R2.1 | R12.1 80.7,56.77 79.4,58.06 v78.94,58.06
  Route2 0.152: v72.16,61.49 v70.49,59.82
  Bottom 0.152: X3.2 52.65,83.9 52.88,83.9 54.25,85.27 56.46,85.27 62.18,79.55 62.18,79.4 S4.4 62.26,79.32 62.48,79.32 67.59,74.22 69.42,74.22 72.92,70.71 73.15,70.71 77.65,66.22 77.65,63.55 75.55,61.46 | 75.55,61.46 75.51,61.49 v72.16,61.49 | 75.55,61.46 v78.94,58.06
N$71  (via drill 0.35)
  Top 0.152: F1.1 93.73,53.42 93.5,53.65 C11.1 93.42,53.65 92.66,53.65 88.54,49.53 85.19,49.53 v84.89,49.23 | D1.C 68.58,39.47 70.41,41.3 70.41,50.6 68.96,52.04 67.59,52.04 64.47,55.17 64.47,61.04 65.46,62.03 65.46,63.78 C12.1
  Bottom 0.152: v84.89,49.23 80.39,44.73 73.69,44.73 68.43,39.47 D1.C
VCC  (via drill 0.35)
  Top 0.152: 81.92,75.13 81.92,76.35 Q1.4 | 81.92,75.13 81.92,74.14 Q1.1 81.92,74.07 81.92,73.76 83.44,72.24 83.44,66.98 v83.59,66.83 | 90.3,73.91 90.22,73.91 88.54,75.59 87.25,75.59 87.02,75.82 87.02,78.87 88.01,79.86 C9.1 | 90.3,73.91 90.75,73.91 C7.1 90.3,73.91 | 81.92,75.13 85.27,75.13 87.02,73.38 87.02,73 87.25,72.77 89.15,72.77 90.3,73.91 | 64.08,49.91 63.32,50.67 63.25,50.67 62.56,51.36 62.56,54.1 59.06,57.61 R8.1 | C21.1 77.8,57.46 79.55,57.46 83.29,53.72 86.94,53.72 IC3.16 | v65.68,49.91 64.08,49.91 | 64.08,49.91 JMP3.2
  Bottom 0.152: v65.68,49.91 71.86,49.91 74.37,52.43 82.75,52.43 83.59,53.26 | 83.59,53.26 85.19,53.26 85.42,53.49 85.65,53.49 85.8,53.65 86.94,53.65 IC3.16 | 83.59,53.26 v83.59,66.83
VDD  (via drill 0.35)
  Top 0.3: 102.72,21.87 102.72,22.86 97.23,28.35 89.46,28.35 TP2.TP 89.38,28.5 89.38,28.88 87.17,31.09 87.17,34.06 98.91,45.8 98.91,53.34 F1.2 98.98,53.42 98.98,56.85 | 102.72,21.87 101.19,20.35 95.56,20.35 POWER.2 | X4.1 121.62,20.12 108.05,20.12 106.38,21.79 102.79,21.79 102.72,21.87 | 80.16,63.86 81.46,63.86 81.69,64.08 IC2.3 81.84,64.16 84.43,64.16 IC2.4 84.51,64.01 84.51,60.12 C14.1 | 80.16,63.86 78.26,63.86 R2.2 | C5.1 71.4,57.53 73.99,57.53 75.21,58.75 83.29,58.75 84.51,59.97 C14.1 | C14.1 84.66,60.05 88.01,60.05 C15.1 88.16,59.89 88.16,59.59 89.15,58.6 94.34,58.6 95.71,59.97 SV1.2 95.86,59.97 98.98,56.85 | 98.98,56.85 108.81,66.68 120.17,66.68 X10.2 | v78.79,76.51 78.79,76.12 76.43,73.76 76.43,71.4 76.81,71.02 77.42,71.02 77.57,71.17 78.41,71.17 IC1.30 | v82.52,79.63 83.21,79.63 85.5,77.34 85.5,76.73 88.16,74.07 88.16,73.91 C2.1 | JMP3.1 64.08,42.22 61.57,39.7 X7.8 61.57,39.85 58.06,43.36 58.06,47.24 57.76,47.55 57.76,53.42 58.98,54.64 R8.2 58.98,54.86 58.98,55.02 57.46,56.54 57.46,63.47 60.05,66.07 62.71,66.07 v62.79,66.14 62.79,67.44 C4.1 62.94,67.51 65.3,67.51 C3.1 | v66.83,70.18 67.82,71.17 69.95,71.17 IC1.7 70.1,71.17 70.87,71.17 72.16,72.47 v72.54,72.47 | X8.1 53.72,74.83 52.04,73.15 52.04,69.49 53.87,67.67 X5.8 | v80.16,64.39 80.16,63.86
  Bottom 0.3: 82.22,79.93 v78.79,76.51 78.71,76.43 78.71,76.2 74.98,72.47 | 82.22,79.93 82.22,84.81 83.13,85.73 SPI.7 | 82.22,79.93 v82.52,79.63 | v66.83,70.18 v62.79,66.14 62.71,66.22 56.54,66.22 55.17,67.59 53.95,67.59 X5.8 | v72.54,72.47 74.98,72.47 | v80.16,64.39 80.16,67.28 74.98,72.47
VSS  (via drill 0.35)
  Top 0.3: 70.6,58.79 71.78,59.97 C1.2 71.93,60.12 74.3,60.12 77.04,62.87 | 70.6,58.79 69.49,57.68 69.49,57.53 C5.2 | IC2.1 81.84,65.99 81.84,65.15 IC2.2 81.69,65.08 77.27,65.08 77.04,64.85 77.04,62.87 | 77.04,62.87 79.86,60.05 81.69,60.05 C14.2 | 66.6,71.55 65.38,70.33 C3.2 65.23,70.33 62.87,70.33 C4.2 | 66.6,71.55 66.75,71.7 69.95,71.7 IC1.6 | S3.6 105.16,26.06 99.06,32.16 TP1.TP 98.98,32.08 C6.2 | v77.11,71.7 78.41,71.7 IC1.31 | C18.2 68.28,28.27 75.9,20.65 RS232-1.1 | RS-232-2.1 86.72,22.25 83.9,22.25 78.41,27.74 78.41,28.27 C17.2 | JMP2.1 61.57,48.16 61.57,47.02 63.4,45.19 63.4,44.12 61.57,42.29 X7.9 | LED3.C 97.38,75.36 97.38,70.94 97.69,70.64 97.69,64.39 95.86,62.56 SV1.3 95.71,62.48 93.27,60.05 90.91,60.05 C15.2 | v61.27,63.86 62.64,63.86 C12.2 | v91.97,53.87 91.82,53.72 90.68,53.72 C11.2 | v81.76,71.63 81.76,70.18 C13.2 | v86.72,70.18 C16.2 | SV2.1 95.4,78.64 90.6,78.64 88.7,76.73 88.24,76.73 C2.2 | v58.98,49.91 58.98,51.21 R9.2 | v121.69,24.08 121.69,23.32 X4.5 | v66.29,71.86 66.6,71.55 | v70.56,58.83 70.6,58.79
  pour Bottom: 1.47,109.6 128.45,109.6 128.7,109.86 128.7,1.57 128.85,1.42 1.9,1.42 1.75,1.57 1.75,109.17 1.07,109.86

## Text on the board
Top: 1.8 FGB@MCHP PS CONTROLLER | these are the controllers you are looking for
200bmp: /fred/Downloads/mchp.bmp